# Altium PCB Wi-FiR.PcbDoc (part 2 of 3)
Units mm, origin at the board's own origin, x right, y up, seen from the top; angles counter-clockwise.
Board outline 58.03 x 53.68 mm, 2 copper layers (Top Layer, Bottom Layer); 105 components, 77 nets, 361 pads, 200 vias.
Unrouted connection lines stored in the file: 1.
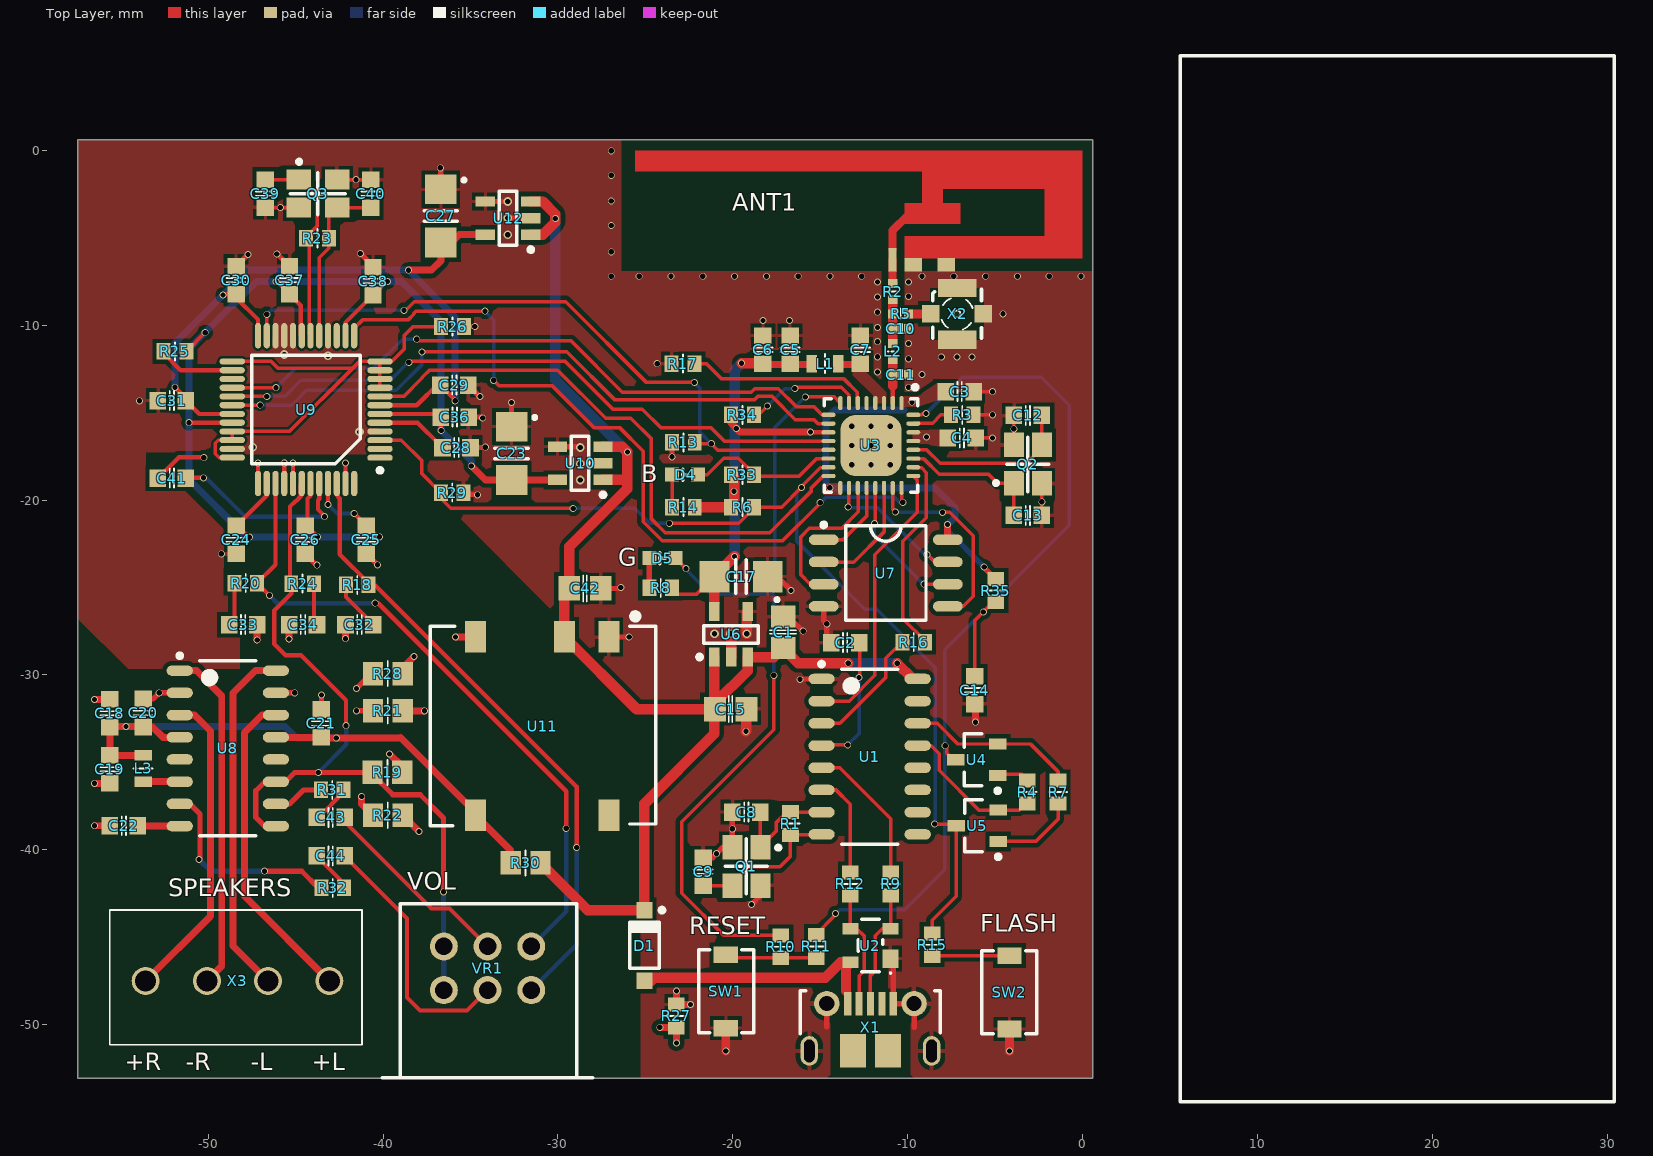
[diagram p0: Top Layer view]

## Part data (continued)
R1 R23: library part CRCW06031M00FKEA, "RES SMD 1M 0603 1% 1/10W", Case/Package=0603, Case Code (Metric)=1608, Manufacturer=Vishay, Max Operating Temperature=155°C, Max Power Dissipation=100mW, Min Operating Temperature=-55°C, Package Quantity=10, Resistance=1MR, Supplier Part Number 1=541-1.00MHCT-ND, Temperature Coefficient=100ppm/°C, Tolerance=1%, Voltage Rating=75V, Case Code (Imperial)=0603, ComponentLink1Description=http://uk.rs-online.com/webdocs/0d98/0900766b80d98afc.pdf?src-supplier=RSComponents, ComponentLink1URL=http://uk.rs-online.com/webdocs/0d98/0900766b80d98afc.pdf?src-supplier=RSComponents, ComponentLink2Description=https://www.distrelec.biz/Web/Downloads/a_/en/flD-CRCW-e3_data_en.pdf?mime=application%2Fpdf&src-supplier=Distrelec, ComponentLink2URL=https://www.distrelec.biz/Web/Downloads/a_/en/flD-CRCW-e3_data_en.pdf?mime=application%2Fpdf&src-supplier=Distrelec, ComponentLink3Description=http://www.vishay.com/docs/20035/dcrcwe3.pdf?src-supplier=Digi-Key, ComponentLink3URL=http://www.vishay.com/docs/20035/dcrcwe3.pdf?src-supplier=Digi-Key, ComponentLink4Description=http://www.vishay.com/docs/20035/dcrcwe3.pdf?src-supplier=Future+Electronics, ComponentLink4URL=http://www.vishay.com/docs/20035/dcrcwe3.pdf?src-supplier=Future+Electronics, ComponentLink5Description=http://www.farnell.com/datasheets/2310790.pdf?src-supplier=Element14, ComponentLink5URL=http://www.farnell.com/datasheets/2310790.pdf?src-supplier=Element14, ComponentLink6Description=http://www.farnell.com/datasheets/125364.pdf?src-supplier=Element14, ComponentLink6URL=http://www.farnell.com/datasheets/125364.pdf?src-supplier=Element14, Composition="Thick Film", Contact Plating=Tin, Depth=0.85mm, Features="Automotive AEC-Q200", Height=0.45mm, Lead Free="Lead Free", Length=1.55mm, Manufacturer Part Number=CRCW06031M00FKEA, Military Standard=Not, Mount="Surface Mount", Number of Pins=2, Number of Terminations=2, Packaging="Tape and Reel", Power Rating=100mW, Pricing 1="1=0.1, 10=0.036, 100=0.0146, 1000=0.0065, 2500=0.0057 (USD)", Radiation Hardening=No, REACH SVHC=Unknown, Stock 1=466723, Supplier 1=Digi-Key, Termination=SMD/SMT, Voltage Rating (DC)=75V, Weight=7.1E-05oz, Width=0.85mm
R2 R5: library part CRCW04020000Z0ED, "RES SMD 0R 0402 JUMPER 1/16W", Case/Package=0402, Case Code (Metric)=1005, Manufacturer=Vishay, Max Operating Temperature=155°C, Max Power Dissipation=63mW, Min Operating Temperature=-55°C, Package Quantity=1, Resistance=0mR, Supplier Part Number 1=541-0.0JCT-ND, Temperature Coefficient=100ppm/°C, Tolerance=5%, Voltage Rating=50V, Case Code (Imperial)=0402, ComponentLink1Description=http://www.vishay.com/docs/20035/dcrcwe3.pdf?src-supplier=Avnet+Europe, ComponentLink1URL=http://www.vishay.com/docs/20035/dcrcwe3.pdf?src-supplier=Avnet+Europe, ComponentLink2Description=http://www.vishay.com/docs/20035/dcrcwe3.pdf?src-supplier=Avnet, ComponentLink2URL=http://www.vishay.com/docs/20035/dcrcwe3.pdf?src-supplier=Avnet, ComponentLink3Description=http://www.vishay.com/docs/20035/dcrcwe3.pdf?src-supplier=Digi-Key, ComponentLink3URL=http://www.vishay.com/docs/20035/dcrcwe3.pdf?src-supplier=Digi-Key, ComponentLink4Description=http://www.farnell.com/datasheets/2793682.pdf?src-supplier=Element14, ComponentLink4URL=http://www.farnell.com/datasheets/2793682.pdf?src-supplier=Element14, ComponentLink5Description=http://www.vishay.com/docs/20035/dcrcwe3.pdf?src-supplier=Allied+Electronics, ComponentLink5URL=http://www.vishay.com/docs/20035/dcrcwe3.pdf?src-supplier=Allied+Electronics, ComponentLink6Description=https://www.distrelec.biz/Web/Downloads/a_/en/flD-CRCW-e3_data_en.pdf?mime=application%2Fpdf&src-supplier=Distrelec, ComponentLink6URL=https://www.distrelec.biz/Web/Downloads/a_/en/flD-CRCW-e3_data_en.pdf?mime=application%2Fpdf&src-supplier=Distrelec, Composition="Thick Film", Contact Plating=Tin, Depth=0.5mm, Features="Automotive AEC-Q200", Height=0.35mm, Lead Free="Lead Free", Length=1mm, Manufacturer Part Number=CRCW04020000Z0ED, Military Standard=Not, Mount="Surface Mount", Number of Terminations=2, Packaging="Tape and Reel", Power Rating=63mW, Pricing 1="1=0.1, 10=0.034, 25=0.0244, 50=0.0186, 100=0.0138, 250=0.0105, 500=0.0084, 1000=0.0062, 5000=0.0044 (USD)", Radiation Hardening=No, REACH SVHC=Unknown, Stock 1=2460113, Supplier 1=Digi-Key, Termination=SMD/SMT, Voltage Rating (DC)=50V, Weight=2.3E-05oz, Width=0.5mm
R3 R4 R7 R13: library part CRCW060312K0FKEAC, "RES SMD 12K 0603 1% 1/10W", Case/Package=0603, Case Code (Metric)=1608, Manufacturer=Vishay, Max Operating Temperature=155°C, Max Power Dissipation=100mW, Min Operating Temperature=-55°C, Resistance=12kR, Supplier Part Number 1=541-4046-1-ND, Temperature Coefficient=100ppm/°C, Tolerance=1%, Case Code (Imperial)=0603, ComponentLink1Description=http://www.vishay.com/docs/28773/crcwce3.pdf?src-supplier=Digi-Key, ComponentLink1URL=http://www.vishay.com/docs/28773/crcwce3.pdf?src-supplier=Digi-Key, Composition="Thick Film", Manufacturer Part Number=CRCW060312K0FKEAC, Number of Terminations=2, Packaging="Cut Tape", Pricing 1="1=0.1, 10=0.036, 100=0.0146, 1000=0.0065, 2500=0.0057 (USD)", Stock 1=84165, Supplier 1=Digi-Key
R6 R31 R32 R33 R34 R35: library part CRCW060310K0FKEA, "RES SMD 10K 0603 1% 1/10W", Case/Package=0603, Case Code (Metric)=1608, Manufacturer=Vishay, Max Operating Temperature=155°C, Max Power Dissipation=100mW, Min Operating Temperature=-55°C, Package Quantity=10, Resistance=10kR, Supplier Part Number 1=541-10.0KHCT-ND, Temperature Coefficient=100ppm/°C, Tolerance=1%, Voltage Rating=75V, Case Code (Imperial)=0603, ComponentLink1Description=http://www.vishay.com/docs/20008/dcrcw.pdf?src-supplier=Avnet+Europe, ComponentLink1URL=http://www.vishay.com/docs/20008/dcrcw.pdf?src-supplier=Avnet+Europe, ComponentLink2Description=https://www.verical.com/server-webapp/html/getDatasheet?partID=86831&src-supplier=Verical, ComponentLink2URL=https://www.verical.com/server-webapp/html/getDatasheet?partID=86831&src-supplier=Verical, ComponentLink3Description=http://www.farnell.com/datasheets/2310790.pdf?src-supplier=Allied+Electronics, ComponentLink3URL=http://www.farnell.com/datasheets/2310790.pdf?src-supplier=Allied+Electronics, ComponentLink4Description=http://www.vishay.com/docs/20035/dcrcwe3.pdf?src-supplier=Digi-Key, ComponentLink4URL=http://www.vishay.com/docs/20035/dcrcwe3.pdf?src-supplier=Digi-Key, ComponentLink5Description=http://www.farnell.com/datasheets/2310790.pdf?src-supplier=Mouser, ComponentLink5URL=http://www.farnell.com/datasheets/2310790.pdf?src-supplier=Mouser, ComponentLink6Description=http://www.farnell.com/datasheets/2310790.pdf?src-supplier=Element14, ComponentLink6URL=http://www.farnell.com/datasheets/2310790.pdf?src-supplier=Element14, ComponentLink7Description=http://www.farnell.com/datasheets/2310790.pdf?src-supplier=Avnet, ComponentLink7URL=http://www.farnell.com/datasheets/2310790.pdf?src-supplier=Avnet, ComponentLink8Description=http://www.vishay.com/docs/20035/dcrcwe3.pdf?src-supplier=Future+Electronics, ComponentLink8URL=http://www.vishay.com/docs/20035/dcrcwe3.pdf?src-supplier=Future+Electronics, ComponentLink9Description=http://uk.rs-online.com/webdocs/0d98/0900766b80d98afc.pdf?src-supplier=RSComponents, ComponentLink9URL=http://uk.rs-online.com/webdocs/0d98/0900766b80d98afc.pdf?src-supplier=RSComponents, ComponentLink10Description=http://www.farnell.com/datasheets/2310790.pdf?src-supplier=Distrelec, ComponentLink10URL=http://www.farnell.com/datasheets/2310790.pdf?src-supplier=Distrelec, Composition="Thick Film", Contact Plating=Tin,Lead, Depth=0.85mm, Features="Automotive AEC-Q200", Height=0.45mm, Lead Free="Lead Free", Length=1.55mm, Manufacturer Part Number=CRCW060310K0FKEA, Military Standard=Not, Number of Pins=2, Number of Terminations=2, Packaging="Tape and Reel", Power Rating=100mW, Pricing 1="1=0.1, 10=0.036, 100=0.0146, 1000=0.0065, 2500=0.0057 (USD)", Radiation Hardening=No, REACH SVHC=Unknown, Stock 1=2959816, Supplier 1=Digi-Key, Termination=SMD/SMT, Voltage Rating (DC)=75V, Weight=7.1E-05oz, Width=0.033inch
R8 R11 R15: library part CRCW0603470RFKEAC, "RES SMD 470 0603 1% 1/10W", Case/Package=0603, Manufacturer=Vishay, Power Rating=100mW, Supplier Part Number 1=541-4038-1-ND, Tolerance=1%, ComponentLink1Description=http://www.vishay.com/docs/28773/crcwce3.pdf?src-supplier=Digi-Key, ComponentLink1URL=http://www.vishay.com/docs/28773/crcwce3.pdf?src-supplier=Digi-Key, Lead Free="Lead Free", Manufacturer Part Number=CRCW0603470RFKEAC, Pricing 1="1=0.1, 10=0.036, 100=0.0146, 1000=0.0065, 2500=0.0057 (USD)", Resistance=470R, Stock 1=239653, Supplier 1=Digi-Key
R9 R12 R18 R20: library part CRCW060320R0FKEAHP, "RES SMD 20 0603 1% 1/4W", Case/Package=0603, Case Code (Metric)=1608, Manufacturer="Vishay Dale", Max Operating Temperature=155°C, Max Power Dissipation=250mW, Min Operating Temperature=-55°C, Package Quantity=10, Supplier Part Number 1=541-20.0SCT-ND, Temperature Coefficient=100ppm/°C, Tolerance=1%, Voltage Rating=75V, Case Code (Imperial)=0603, ComponentLink1Description=http://www.vishay.com/docs/20043/crcwhpe3.pdf?src-supplier=Avnet, ComponentLink1URL=http://www.vishay.com/docs/20043/crcwhpe3.pdf?src-supplier=Avnet, ComponentLink2Description=http://www.vishay.com/docs/20043/crcwhpe3.pdf?src-supplier=Digi-Key, ComponentLink2URL=http://www.vishay.com/docs/20043/crcwhpe3.pdf?src-supplier=Digi-Key, ComponentLink3Description=http://www.vishay.com/doc?20043?src-supplier=Mouser, ComponentLink3URL=http://www.vishay.com/doc?20043?src-supplier=Mouser, Composition="Thick Film", Contact Plating=Tin, Depth=0.85mm, Features="Automotive AEC-Q200", Height=0.45mm, Lead Free="Lead Free", Length=1.6mm, Manufacturer Part Number=CRCW060320R0FKEAHP, Mount="Surface Mount", Number of Terminations=2, Packaging="Tape and Reel", Power Rating=250mW, Pricing 1="1=0.18, 10=0.149, 100=0.0581, 1000=0.0243, 2500=0.0223 (USD)", Radiation Hardening=No, Resistance=20R, Stock 1=2361, Supplier 1=Digi-Key, Termination=Wraparound, Weight=7.1E-05oz, Width=0.033inch
R10 R17 R27: library part CRCW0603-0000Z0EA, "RES SMD 0R 0603 JUMPER PU=5000 ST, CRCW06030000Z0EA, Vishay", Case/Package=0603, Case Code (Metric)=1608, Current Rating=2A, Manufacturer=Vishay, Max Operating Temperature=155°C, Max Power Dissipation=100mW, Min Operating Temperature=-55°C, Package Quantity=1, Resistance=0mR, Supplier Part Number 1=70202889, Temperature Coefficient=100ppm/°C, Tolerance=5%, Voltage Rating=75V, Case Code (Imperial)=0603, ComponentLink1Description=http://www.vishay.com/docs/20035/dcrcwe3.pdf?src-supplier=Digi-Key, ComponentLink1URL=http://www.vishay.com/docs/20035/dcrcwe3.pdf?src-supplier=Digi-Key, ComponentLink2Description=http://www.farnell.com/datasheets/2310790.pdf?src-supplier=Avnet, ComponentLink2URL=http://www.farnell.com/datasheets/2310790.pdf?src-supplier=Avnet, ComponentLink3Description=http://www.vishay.com/docs/20008/dcrcw.pdf?src-supplier=Avnet+Europe, ComponentLink3URL=http://www.vishay.com/docs/20008/dcrcw.pdf?src-supplier=Avnet+Europe, ComponentLink4Description=http://www.vishay.com/docs/20035/dcrcwe3.pdf?src-supplier=Future+Electronics, ComponentLink4URL=http://www.vishay.com/docs/20035/dcrcwe3.pdf?src-supplier=Future+Electronics, ComponentLink5Description=http://www.alliedelec.com/m/d/0c934d6939ccefa68dbe0b96d821c8cf.pdf?src-supplier=Allied+Electronics, ComponentLink5URL=http://www.alliedelec.com/m/d/0c934d6939ccefa68dbe0b96d821c8cf.pdf?src-supplier=Allied+Electronics, ComponentLink6Description=https://www.distrelec.biz/Web/Downloads/a_/en/flD-CRCW-e3_data_en.pdf?mime=application%2Fpdf&src-supplier=Distrelec, ComponentLink6URL=https://www.distrelec.biz/Web/Downloads/a_/en/flD-CRCW-e3_data_en.pdf?mime=application%2Fpdf&src-supplier=Distrelec, ComponentLink7Description=http://www.farnell.com/datasheets/2310790.pdf?src-supplier=Mouser, ComponentLink7URL=http://www.farnell.com/datasheets/2310790.pdf?src-supplier=Mouser, ComponentLink8Description=http://www.farnell.com/datasheets/2310790.pdf?src-supplier=Element14, ComponentLink8URL=http://www.farnell.com/datasheets/2310790.pdf?src-supplier=Element14, ComponentLink9Description=http://www.farnell.com/datasheets/125364.pdf?src-supplier=Element14, ComponentLink9URL=http://www.farnell.com/datasheets/125364.pdf?src-supplier=Element14, Composition="Thick Film", Contact Plating=Tin,Lead, Depth=0.85mm, Features="Automotive AEC-Q200", Height=0.02inch, Lead Free="Lead Free", Length=1.55mm, Manufacturer Part Number=CRCW0603-0000Z0EA, Military Standard=Not, Mount="Surface Mount", Number of Terminations=2, Packaging="Tape and Reel", Power Rating=100mW, Radiation Hardening=No, REACH SVHC=Unknown, Stock 1=0, Supplier 1="Allied Electronics", Termination=SMD/SMT, Voltage Rating (DC)=75V, Weight=7.1E-05oz, Width=0.033inch, Working Voltage=75V
R14: library part CRCW06032K20FKEAC, "RES SMD 2.2K 0603 1% 1/10W", Case/Package=Molded, Manufacturer="Vishay Semiconductors", Max Operating Temperature=155°C, Min Operating Temperature=-55°C, Power Rating=100mW, Resistance=2.2kR, Supplier Part Number 1=541-4022-1-ND, Temperature Coefficient=100ppm/°C, Tolerance=1%, ComponentLink1Description=http://www.vishay.com/docs/20035/dcrcwe3.pdf?src-supplier=Avnet+Asia, ComponentLink1URL=http://www.vishay.com/docs/20035/dcrcwe3.pdf?src-supplier=Avnet+Asia, ComponentLink2Description=http://www.vishay.com/docs/28773/crcwce3.pdf?src-supplier=Digi-Key, ComponentLink2URL=http://www.vishay.com/docs/28773/crcwce3.pdf?src-supplier=Digi-Key, Composition="Thick Film", Contact Plating=Tin, Lead Free="Lead Free", Length=1.55mm, Manufacturer Part Number=CRCW06032K20FKEAC, Mount="Surface Mount", Pricing 1="1=0.1, 10=0.036, 100=0.0146, 1000=0.0065, 2500=0.0057 (USD)", Stock 1=175447, Supplier 1=Digi-Key, Termination=Wraparound
R16: library part CRCW0603499RFKEAHP, "RES SMD 499 0603 1% 1/4W", Case/Package=0603, Case Code (Metric)=1608, Manufacturer="Vishay Dale", Max Operating Temperature=155°C, Max Power Dissipation=250mW, Min Operating Temperature=-55°C, Package Quantity=10, Supplier Part Number 1=541-499SCT-ND, Temperature Coefficient=100ppm/°C, Tolerance=1%, Voltage Rating=75V, Case Code (Imperial)=0603, ComponentLink1Description=http://www.vishay.com/docs/20043/crcwhpe3.pdf?src-supplier=Digi-Key, ComponentLink1URL=http://www.vishay.com/docs/20043/crcwhpe3.pdf?src-supplier=Digi-Key, ComponentLink2Description=http://www.mouser.com/ds/2/427/crcwhpe3-46056.pdf?src-supplier=Mouser, ComponentLink2URL=http://www.mouser.com/ds/2/427/crcwhpe3-46056.pdf?src-supplier=Mouser, ComponentLink3Description=http://www.vishay.com/docs/20043/crcwhpe3.pdf?src-supplier=Avnet, ComponentLink3URL=http://www.vishay.com/docs/20043/crcwhpe3.pdf?src-supplier=Avnet, Composition="Thick Film", Contact Plating=Tin, Depth=0.85mm, Features="Automotive AEC-Q200", Height=0.45mm, Lead Free="Lead Free", Length=1.6mm, Manufacturer Part Number=CRCW0603499RFKEAHP, Military Standard=Not, Number of Terminations=2, Packaging="Tape and Reel", Power Rating=250mW, Pricing 1="1=0.18, 10=0.149, 100=0.0581, 1000=0.0243, 2500=0.0223 (USD)", Radiation Hardening=No, Resistance=499R, Stock 1=127078, Supplier 1=Digi-Key, Termination=SMD/SMT, Weight=7.1E-05oz, Width=0.033inch
R19 R21 R22 R28 R30: library part CRCW08050000Z0EAHP, "RES SMD 0R 0805 JUMPER 1/2W", Case/Package=0805, Case Code (Metric)=2012, Manufacturer="Vishay Dale", Max Operating Temperature=155°C, Max Power Dissipation=500mW, Min Operating Temperature=-55°C, Package Quantity=5000, Power Rating=330mW, Resistance=0mR, Supplier Part Number 1=541-0.0TBCT-ND, Temperature Coefficient=0ppm/°C, Tolerance=5%, Voltage Rating=150V, Case Code (Imperial)=0805, ComponentLink1Description=http://www.vishay.com/docs/20043/crcwhpe3.pdf?src-supplier=Future+Electronics, ComponentLink1URL=http://www.vishay.com/docs/20043/crcwhpe3.pdf?src-supplier=Future+Electronics, ComponentLink2Description=http://www.vishay.com/docs/20043/crcwhpe3.pdf?src-supplier=Digi-Key, ComponentLink2URL=http://www.vishay.com/docs/20043/crcwhpe3.pdf?src-supplier=Digi-Key, ComponentLink3Description=http://www.mouser.com/ds/2/427/crcwhpe3-46056.pdf?src-supplier=Mouser, ComponentLink3URL=http://www.mouser.com/ds/2/427/crcwhpe3-46056.pdf?src-supplier=Mouser, ComponentLink4Description=http://www.vishay.com/docs/20043/crcwhpe3.pdf?src-supplier=Avnet+Europe, ComponentLink4URL=http://www.vishay.com/docs/20043/crcwhpe3.pdf?src-supplier=Avnet+Europe, ComponentLink5Description=http://www.vishay.com/docs/20043/crcwhpe3.pdf?src-supplier=Avnet, ComponentLink5URL=http://www.vishay.com/docs/20043/crcwhpe3.pdf?src-supplier=Avnet, ComponentLink6Description=http://www.farnell.com/datasheets/2046716.pdf?src-supplier=Element14, ComponentLink6URL=http://www.farnell.com/datasheets/2046716.pdf?src-supplier=Element14, Composition="Thick Film", Contact Plating=Tin, Depth=1.25mm, Features="Automotive AEC-Q200", Height=0.024inch, Lead Free="Lead Free", Length=2mm, Manufacturer Part Number=CRCW08050000Z0EAHP, Military Standard=Not, Mount="Surface Mount", Number of Pins=2, Number of Terminations=2, Packaging="Tape and Reel", Pricing 1="1=0.25, 10=0.213, 25=0.1548, 50=0.1122, 100=0.0832, 250=0.0639, 500=0.0503, 1000=0.0349 (USD)", Radiation Hardening=No, REACH SVHC="No SVHC", Stock 1=330626, Supplier 1=Digi-Key, Termination=Solder, Voltage Rating (DC)=150V, Weight=0.000194oz, Width=0.049inch
R24: library part RCA060310R0FKEAHP, "RES SMD 10 0603 1% 1/4W", Case/Package=0603, Case Code (Metric)=1608, Current Rating=700mA, DC Resistance (DCR)=170mR, Inductance=15nH, Manufacturer="Vishay Dale", Max Operating Temperature=125°C, Max Power Dissipation=250mW, Min Operating Temperature=-55°C, Ratings=AEC-Q200, Self Resonant Frequency=4GHz, Supplier Part Number 1=541-3243-1-ND, Temperature Coefficient=100ppm/°C, Test Frequency=250MHz, Tolerance=2%, Case Code (Imperial)=0603, ComponentLink1Description=http://www.vishay.com/docs/20067/rcahp.pdf?src-supplier=Digi-Key, ComponentLink1URL=http://www.vishay.com/docs/20067/rcahp.pdf?src-supplier=Digi-Key, Composition="Thick Film,Wirewound", Core Material=Non-Magnetic, Features="Automotive AEC-Q200,Anti-Sulfur", Manufacturer Part Number=RCA060310R0FKEAHP, Mount="Surface Mount", Number of Terminations=2, Packaging="Cut Tape", Pricing 1="1=0.18, 10=0.156, 100=0.0611, 1000=0.0256, 2500=0.0234 (USD)", Resistance=10R, Shielding=Unshielded, Stock 1=23109, Supplier 1=Digi-Key
R25 R26 R29: library part CRCW0603-100KFKEA, "RES SMD 100K 0603 0.1W 1% SMT TCR 37 ppm/DegC", Case/Package=0603, Case Code (Metric)=1608, Manufacturer=Vishay, Max Operating Temperature=155°C, Max Power Dissipation=100mW, Min Operating Temperature=-55°C, Package Quantity=10, Resistance=100kR, Supplier Part Number 1=541-100KHDKR-ND, Temperature Coefficient=100ppm/°C, Tolerance=1%, Voltage Rating=75V, Case Code (Imperial)=0603, ComponentLink1Description=http://www.vishay.com/docs/20035/dcrcwe3.pdf?src-supplier=Digi-Key, ComponentLink1URL=http://www.vishay.com/docs/20035/dcrcwe3.pdf?src-supplier=Digi-Key, ComponentLink2Description=http://www.farnell.com/datasheets/2310790.pdf?src-supplier=Element14, ComponentLink2URL=http://www.farnell.com/datasheets/2310790.pdf?src-supplier=Element14, ComponentLink3Description=https://www.verical.com/server-webapp/html/getDatasheet?partID=93113&src-supplier=Verical, ComponentLink3URL=https://www.verical.com/server-webapp/html/getDatasheet?partID=93113&src-supplier=Verical, ComponentLink4Description=http://www.farnell.com/datasheets/2045673.pdf?src-supplier=Element14, ComponentLink4URL=http://www.farnell.com/datasheets/2045673.pdf?src-supplier=Element14, ComponentLink5Description=http://www.farnell.com/datasheets/2310790.pdf?src-supplier=Avnet, ComponentLink5URL=http://www.farnell.com/datasheets/2310790.pdf?src-supplier=Avnet, ComponentLink6Description=http://www.farnell.com/datasheets/2310790.pdf?src-supplier=Allied+Electronics, ComponentLink6URL=http://www.farnell.com/datasheets/2310790.pdf?src-supplier=Allied+Electronics, ComponentLink7Description=http://www.vishay.com/docs/20035/dcrcwe3.pdf?src-supplier=Avnet, ComponentLink7URL=http://www.vishay.com/docs/20035/dcrcwe3.pdf?src-supplier=Avnet, ComponentLink8Description=http://www.farnell.com/datasheets/2310790.pdf?src-supplier=Mouser, ComponentLink8URL=http://www.farnell.com/datasheets/2310790.pdf?src-supplier=Mouser, ComponentLink9Description=http://uk.rs-online.com/webdocs/0d98/0900766b80d98afc.pdf?src-supplier=RSComponents, ComponentLink9URL=http://uk.rs-online.com/webdocs/0d98/0900766b80d98afc.pdf?src-supplier=RSComponents, ComponentLink10Description=http://www.farnell.com/datasheets/2310790.pdf?src-supplier=Distrelec, ComponentLink10URL=http://www.farnell.com/datasheets/2310790.pdf?src-supplier=Distrelec, ComponentLink11Description=http://www.vishay.com/docs/20008/dcrcw.pdf?src-supplier=Avnet+Europe, ComponentLink11URL=http://www.vishay.com/docs/20008/dcrcw.pdf?src-supplier=Avnet+Europe, Composition="Thick Film", Contact Plating=Tin,Lead, Depth=0.85mm, Features="Automotive AEC-Q200", Height=0.45mm, Lead Free="Lead Free", Length=1.55mm, Manufacturer Part Number=CRCW0603-100KFKEA, Military Standard=Not, Number of Pins=2, Number of Terminations=2, Packaging="Tape and Reel", Power Rating=100mW, Pricing 1="1=0.1, 10=0.037, 100=0.0151, 1000=0.0068, 2500=0.0059 (USD)", Radiation Hardening=No, REACH SVHC=Unknown, Stock 1=945194, Supplier 1=Digi-Key, Termination=SMD/SMT, Voltage Rating (DC)=75V, Weight=7.1E-05oz, Width=0.033inch
SW1 SW2: library part PTS820J25MSMTRLFS, "SWITCH TACT SPST-NO 0.05A 12V", Color=Silver, Current Rating=50mA, Manufacturer="ITT C&K", Max Operating Temperature=85°C, Min Operating Temperature=-40°C, Operating Force=160gf, Package Quantity=2300, Supplier Part Number 1=CKN10839CT-ND, Voltage Rating (DC)=12V, Actuator Type=Standard, Contact Plating=Silver, Illumination Type=Non-Illuminated, Manufacturer Part Number=PTS820J25MSMTRLFS, Mechanical Life=200000Cycles, Mount="Surface Mount", Packaging="Tape and Reel", Pricing 1="1=0.51, 10=0.489, 25=0.4804, 50=0.4622, 100=0.3988, 250=0.3625, 500=0.3444, 1000=0.2719 (USD)", Stock 1=9227, Supplier 1=Digi-Key, Switch Function=Off-Mom, Switch Travel=0.2mm, Throw Configuration=SPST
U1: library part "IC CH340G USB to serial chip", "IC CH340G USB to serial chip"
U2: library part CD143A-SR05, "TVS DIODE 5V 20V SOT143", Breakdown Voltage=6V, Capacitance=10pF, Case/Package=SOT-143, Clamping Voltage=20V, Leakage Current=5uA, Manufacturer=Bourns, Max Operating Temperature=150°C, Max Power Dissipation=500W, Min Operating Temperature=-55°C, Package Quantity=1, Peak Pulse Current=30A, Power Line Protection=Yes, Reverse Standoff Voltage=5V, Supplier Part Number 1=CD143A-SR05CT-ND, Test Current=1mA, ComponentLink1Description=https://www.verical.com/server-webapp/html/getDatasheet?partID=29449&src-supplier=Verical, ComponentLink1URL=https://www.verical.com/server-webapp/html/getDatasheet?partID=29449&src-supplier=Verical, ComponentLink2Description=http://www.farnell.com/datasheets/1671020.pdf?src-supplier=Farnell, ComponentLink2URL=http://www.farnell.com/datasheets/1671020.pdf?src-supplier=Farnell, ComponentLink3Description=https://www.bourns.com/docs/Product-Datasheets/CD143A-SR05_12.pdf?src-supplier=Digi-Key, ComponentLink3URL=https://www.bourns.com/docs/Product-Datasheets/CD143A-SR05_12.pdf?src-supplier=Digi-Key, ComponentLink4Description=http://www.farnell.com/datasheets/1671020.pdf?src-supplier=Element14, ComponentLink4URL=http://www.farnell.com/datasheets/1671020.pdf?src-supplier=Element14, ComponentLink5Description=http://www.bourns.com/docs/Product-Datasheets/CD143A-SR05_12.pdf?src-supplier=Digi-Key, ComponentLink5URL=http://www.bourns.com/docs/Product-Datasheets/CD143A-SR05_12.pdf?src-supplier=Digi-Key, ComponentLink6Description=http://www.bourns.com/pdfs/CD143A-SR05_12.pdf?src-supplier=Avnet+Europe, ComponentLink6URL=http://www.bourns.com/pdfs/CD143A-SR05_12.pdf?src-supplier=Avnet+Europe, ComponentLink7Description=http://www.bourns.com/pdfs/CD143A-SR05_12.pdf?src-supplier=Avnet, ComponentLink7URL=http://www.bourns.com/pdfs/CD143A-SR05_12.pdf?src-supplier=Avnet, ComponentLink8Description=http://www.mouser.com/ds/2/54/D143A-SR05_12-777248.pdf?src-supplier=Mouser, ComponentLink8URL=http://www.mouser.com/ds/2/54/D143A-SR05_12-777248.pdf?src-supplier=Mouser, Contact Plating=Tin, Depth=1.39mm, Direction=Unidirectional, Element Configuration=Dual, ESD Protection=Yes, Height=0.045inch, Length=3.04mm, Manufacturer Part Number=CD143A-SR05, Max Breakdown Voltage=6V, Max Reverse Leakage Current=5uA, Min Breakdown Voltage=6V, Mount="Surface Mount", Number of Bidirectional Channels=2, Number of Channels=2, Number of Elements=1, Number of Pins=4, Packaging="Tape and Reel", Peak Pulse Power=500W, Polarity=Unidirectional, Power Dissipation=500W, Pricing 1="1=0.93, 10=0.836, 25=0.7932, 100=0.6515, 250=0.609, 500=0.5382, 1000=0.4249 (USD)", Radiation Hardening=No, REACH SVHC="No SVHC", Reverse Breakdown Voltage=6V, Stock 1=13371, Supplier 1=Digi-Key, Termination=SMD/SMT, Width=0.055inch, Working Voltage=5V
U3: "IC ESP8266EX, QFN32-PIN, 5_5", Current - Receiving=56mA, Current - Transmitting=170mA, Frequency=2.4GHz, Manufacturer="Espressif Systems", Supplier Part Number 1=1904-1001-1-ND, ComponentLink1Description=https://www.espressif.com/sites/default/files/documentation/esp8266_quick_start_guide_en.pdf?src-supplier=Digi-Key, ComponentLink1URL=https://www.espressif.com/sites/default/files/documentation/esp8266_quick_start_guide_en.pdf?src-supplier=Digi-Key, Data Rate=54Mbps, Interface=I2C,SPI,UART, Manufacturer Part Number=ESP8266EX, Number of GPIO=8, Packaging="Cut Tape", Pricing 1="1=1.6 (USD)", Sensitivity=-91dBm, Stock 1=4908, Supplier 1=Digi-Key
U4 U5: library part MMSS8050-H-TP, "TRANS NPN 25V 1.5A SOT23", Case/Package=SOT-23, Collector Base Voltage (VCBO)=40V, Collector Emitter Breakdown Voltage=25V, Collector Emitter Saturation Voltage=500mV, Emitter Base Voltage (VEBO)=5V, Manufacturer=MCC, Max Collector Current=1.5A, Max Operating Temperature=150°C, Max Power Dissipation=625mW, Min Operating Temperature=-55°C, Package Quantity=3000, Supplier Part Number 1=MMSS8050-H-TPMSCT-ND, Transition Frequency=100MHz, Collector Emitter Voltage (VCEO)=500mV, ComponentLink1Description=http://www.mouser.com/ds/2/258/MMSS8050-255048.pdf?src-supplier=Mouser, ComponentLink1URL=http://www.mouser.com/ds/2/258/MMSS8050-255048.pdf?src-supplier=Mouser, ComponentLink2Description=http://www.mccsemi.com/up_pdf/MMSS8050(SOT-23).pdf?src-supplier=Digi-Key, ComponentLink2URL=http://www.mccsemi.com/up_pdf/MMSS8050(SOT-23).pdf?src-supplier=Digi-Key, Element Configuration=Single, Gain Bandwidth Product=100MHz, hFE Min=120, Lead Free="Lead Free", Manufacturer Part Number=MMSS8050-H-TP, Max Breakdown Voltage=25V, Mount="Surface Mount", Number of Pins=3, Packaging="Tape and Reel", Polarity=NPN, Stock 1=77779, Supplier 1=Digi-Key
U6 U10: library part TLV70233DBVR, "IC REG LIN 3.3V 300mALow IQLDO Reg", Case/Package=SOT-23-5, Dropout Voltage=375mV, Manufacturer="Texas Instruments", Max Input Voltage=5.5V, Max Operating Temperature=125°C, Max Output Current=300mA, Max Power Dissipation=500mW, Min Current Limit=320mA, Min Input Voltage=2V, Min Operating Temperature=-40°C, Output Voltage Accuracy=0.5%, Package Quantity=1, Power Supply Rejection Ratio (PSRR)=68dB, Quiescent Current=30uA, Supplier Part Number 1=296-32415-1-ND, Accuracy=2%, ComponentLink1Description=http://www.farnell.com/datasheets/1882072.pdf?src-supplier=Element14, ComponentLink1URL=http://www.farnell.com/datasheets/1882072.pdf?src-supplier=Element14, ComponentLink2Description=http://www.ti.com/lit/ds/symlink/tlv702.pdf?src-supplier=Digi-Key, ComponentLink2URL=http://www.ti.com/lit/ds/symlink/tlv702.pdf?src-supplier=Digi-Key, Lead Free="Lead Free", Manufacturer Part Number=TLV70233DBVR, Max Output Voltage=3.3V, Min Output Voltage=3.3V, Nominal Output Voltage=3.3V, Number of Outputs=1, Number of Pins=5, Number of Regulators=1, Output Current=300mA, Output Type=Fixed, Output Voltage=3.3V, Packaging="Tape and Reel", Polarity=Positive, Power Dissipation=500mW, Pricing 1="1=0.5, 10=0.428, 100=0.3192, 500=0.2508, 1000=0.1938 (USD)", Radiation Hardening=No, REACH SVHC="No SVHC", Stock 1=29164, Supplier 1=Digi-Key
U7: library part W25Q32JVSSIQTR, "IC FLASH 32M SPI 133MHZ 8SOIC", Case/Package=SOIC, Frequency=104MHz, Manufacturer=Winbond, Max Operating Temperature=85°C, Min Operating Temperature=-40°C, Supplier Part Number 1=W25Q32JVSSIQCT-ND, ComponentLink1Description=http://www.winbond.com/resource-files/w25q32jv%20revg%2003272018%20plus.pdf?src-supplier=Digi-Key, ComponentLink1URL=http://www.winbond.com/resource-files/w25q32jv%20revg%2003272018%20plus.pdf?src-supplier=Digi-Key, Interface=SPI,Serial, Manufacturer Part Number=W25Q32JVSSIQTR, Memory Type=FLASH,NOR, Packaging="Tape and Reel", Stock 1=121887, Supplier 1=Digi-Key
U8: library part PAM8403DR-H, "IC AMP AUDIO 3W CLASS D 16SOIC", Case/Package=SOP, Manufacturer=Diodes, Max Operating Temperature=85°C, Max Output Power=3W, Max Supply Voltage=5.5V, Min Operating Temperature=-40°C, Min Supply Voltage=2.5V, Operating Supply Voltage=5V, Package Quantity=2500, Power Supply Rejection Ratio (PSRR)=59dB, Supplier Part Number 1=PAM8403DR-HDICT-ND, Voltage Gain=24dB, ComponentLink1Description=http://www.diodes.com/datasheets/PAM8403H.pdf?src-supplier=Avnet, ComponentLink1URL=http://www.diodes.com/datasheets/PAM8403H.pdf?src-supplier=Avnet, ComponentLink2Description=https://www.diodes.com/assets/Datasheets/PAM8403H.pdf?src-supplier=Digi-Key, ComponentLink2URL=https://www.diodes.com/assets/Datasheets/PAM8403H.pdf?src-supplier=Digi-Key, Manufacturer Part Number=PAM8403DR-H, Mount="Surface Mount", Number of Pins=16, Packaging="Tape and Reel", Pricing 1="1=0.81, 10=0.714, 100=0.5472, 500=0.4326, 1000=0.3461 (USD)", Radiation Hardening=No, Stock 1=8119, Supplier 1=Digi-Key
U9: library part 1681, "IC VS1053B MP3/WAV/OGG/MIDI Player & Recorder (CODEC) Chip", Manufacturer="Adafruit Industries", Supplier Part Number 1=1528-2645-ND, Manufacturer Part Number=1681, Pricing 1="1=12.5 (USD)", Stock 1=133, Supplier 1=Digi-Key
U11: library part R1SE-0505-R, "DC DC CONVERTER 5V 1W", Case/Package=SMD/SMT, Current - Output 1=200mA, Isolation Voltage=1kV, Manufacturer=Recom, Max Input Voltage=5.5V, Max Operating Temperature=85°C, Max Output Power=1W, Max Output Voltage=5V, Min Input Voltage=4.5V, Min Operating Temperature=-40°C, Package Quantity=1, Supplier Part Number 1=945-1659-1-ND, ComponentLink1Description=http://www.rapidonline.com/pdf/676127_da_en_01.pdf?src-supplier=Rapid+Electronics, ComponentLink1URL=http://www.rapidonline.com/pdf/676127_da_en_01.pdf?src-supplier=Rapid+Electronics, ComponentLink2Description=https://www.recom-power.com/pdf/Econoline/R1SE.pdf?src-supplier=Digi-Key, ComponentLink2URL=https://www.recom-power.com/pdf/Econoline/R1SE.pdf?src-supplier=Digi-Key, ComponentLink3Description=http://www.farnell.com/datasheets/1662785.pdf?src-supplier=Element14, ComponentLink3URL=http://www.farnell.com/datasheets/1662785.pdf?src-supplier=Element14, Depth=12.75mm, Efficiency=75%, Features=SCP, Height=6.7mm, Isolation=Isolated, Lead Free="Lead Free", Length=12.75mm, Manufacturer Part Number=R1SE-0505-R, Max Input Voltage (DC)=5.5V, Max Output Current=200mA, Max Power Dissipation=1W, Min Input Voltage (DC)=4.5V, Mount="Surface Mount", Nominal Input Voltage=5V, Nominal Output Voltage=5V, Number of Outputs=1, Number of Pins=5, Output Current=200mA, Output Power=1W, Output Voltage=5V, Packaging="Tape and Reel", Pricing 1="1=3.21, 5=3.162, 10=3.117, 25=3.0252, 50=2.9334, 100=2.8418, 250=2.7501 (USD)", REACH SVHC="No SVHC", Stock 1=12574, Supplier 1=Digi-Key, Voltage - Output 1=5V, Weight=1g, Width=10.7mm
U12: library part TLV70218DBVT, "IC REG LIN 1.8V 300MA SOT23-5", Case/Package=SOT-23, Dropout Voltage=220mV, Manufacturer="Texas Instruments", Max Input Voltage=5.5V, Max Operating Temperature=125°C, Max Output Current=300mA, Max Power Dissipation=500mW, Min Current Limit=320mA, Min Input Voltage=2V, Min Operating Temperature=-40°C, Output Voltage Accuracy=0.5%, Package Quantity=1, Quiescent Current=30uA, Supplier Part Number 1=296-27889-1-ND, Accuracy=2%, ComponentLink1Description=http://www.ti.com/lit/ds/symlink/tlv702.pdf?src-supplier=Digi-Key, ComponentLink1URL=http://www.ti.com/lit/ds/symlink/tlv702.pdf?src-supplier=Digi-Key, Contact Plating=Gold, Height=1.3mm, Lead Free="Lead Free", Length=3.05mm, Manufacturer Part Number=TLV70218DBVT, Max Output Voltage=1.8V, Min Output Voltage=1.8V, Nominal Output Voltage=1.8V, Number of Outputs=1, Number of Pins=5, Number of Regulators=1, Output Current=300mA, Output Type=Fixed, Output Voltage=1.8V, Packaging="Tape and Reel", Polarity=Positive, Power Dissipation=500mW, Power Rating=500mW, Pricing 1="1=0.58, 10=0.495, 100=0.3696 (USD)", REACH SVHC="No SVHC", Stock 1=3659, Supplier 1=Digi-Key, Width=1.75mm
VR1: library part PTD902-1025K-B503, "POT 50K LINEAR", Manufacturer=Bourns, Max Operating Temperature=50°C, Max Power Dissipation=50mW, Min Operating Temperature=-10°C, Package Quantity=108, Resistance=50kR, Supplier Part Number 1=PTD902-1025K-B503-ND, Tolerance=10%, Actuator Diameter=0.236inch, Actuator Length=0.984inch, ComponentLink1Description=http://www.bourns.com/docs/Product-Datasheets/PTD90.pdf?src-supplier=Digi-Key, ComponentLink1URL=http://www.bourns.com/docs/Product-Datasheets/PTD90.pdf?src-supplier=Digi-Key, ComponentLink2Description=http://www.mouser.com/ds/2/54/TD90-777943.pdf?src-supplier=Mouser, ComponentLink2URL=http://www.mouser.com/ds/2/54/TD90-777943.pdf?src-supplier=Mouser, Composition=Carbon, Depth=9.5mm, Length=34.65mm, Manufacturer Part Number=PTD902-1025K-B503, Military Standard=Not, Mount="Panel,Through Hole", Number of Gangs=2, Number of Turns=1, Packaging=Bulk, Power Rating=50mW, Pricing 1="1=2.01, 10=1.769, 25=1.586, 50=1.525, 108=1.464, 324=1.403, 540=1.159, 1080=1.098, 5076=0.915 (USD)", Radiation Hardening=No, Stock 1=183, Supplier 1=Digi-Key, Taper=Linear, Termination=Pin, Type=Potentiometer
X1: library part 105017-1001, "CONN USB Type B RCP 5 POS 0.65mm Solder RA Thru-Hole 5 Terminal 1 Port Embossed T/R", Manufacturer=Molex, Max Operating Temperature=85°C, Max Voltage Rating (AC)=30V, Min Operating Temperature=-30°C, Package Quantity=1, Supplier Part Number 1=WM11262CT-ND, ComponentLink1Description=http://www.molex.com/pdm_docs/sd/1050171001_sd.pdf?src-supplier=Digi-Key, ComponentLink1URL=http://www.molex.com/pdm_docs/sd/1050171001_sd.pdf?src-supplier=Digi-Key, ComponentLink2Description=https://www.verical.com/server-webapp/html/getDatasheet?partID=551961&src-supplier=Verical, ComponentLink2URL=https://www.verical.com/server-webapp/html/getDatasheet?partID=551961&src-supplier=Verical, Connector Type=USB, Contact Material="Copper Alloy", Contact Plating=Gold, Depth=5mm, Gender=Receptacle, Housing Material=Polymer, Length=7.5mm, Manufacturer Part Number=105017-1001, Mount="Surface Mount,Horizontal,Through Hole", Number of Contacts=5, Number of Ports=1, Number of Terminals=5, Orientation="Right Angle", Packaging="Tape and Reel", Pitch=0.65mm, Pricing 1="1=1.6, 10=1.456, 25=1.3668, 50=1.3072, 100=1.2479, 250=1.129, 500=1.0399, 1000=0.8913 (USD)", Radiation Hardening=No, REACH SVHC="No SVHC", Stock 1=8707, Supplier 1=Digi-Key, Termination=Solder, USB Standard="USB 2.0"
X2: library part 73412-0110, "CONN U.FL 50OHM MOLEX 73412-0110 RF COAXIAL, MICROCOAXIAL, JACK", Frequency=6GHz, Insulation Resistance=500MR, Manufacturer=Molex, Max Operating Temperature=90°C, Min Operating Temperature=-40°C, Package Quantity=5000, Supplier Part Number 1=WM5587CT-ND, Voltage Rating=60V, Body Material="Polymer,Liquid Crystal Polymer", Body Plating=Gold, ComponentLink1Description=http://www.molex.com/webdocs/datasheets/pdf/en-us/0734120110_RF_COAX_CONNECTORS.pdf?src-supplier=Avnet+Europe, ComponentLink1URL=http://www.molex.com/webdocs/datasheets/pdf/en-us/0734120110_RF_COAX_CONNECTORS.pdf?src-supplier=Avnet+Europe, ComponentLink2Description=http://uk.rs-online.com/webdocs/13c4/0900766b813c49d5.pdf?src-supplier=RSComponents, ComponentLink2URL=http://uk.rs-online.com/webdocs/13c4/0900766b813c49d5.pdf?src-supplier=RSComponents, ComponentLink3Description=http://www.farnell.com/datasheets/1841262.pdf?src-supplier=Farnell, ComponentLink3URL=http://www.farnell.com/datasheets/1841262.pdf?src-supplier=Farnell, ComponentLink4Description=http://www.molex.com/webdocs/datasheets/pdf/en-us/0734120110_RF_COAX_CONNECTORS.pdf?src-supplier=Mouser, ComponentLink4URL=http://www.molex.com/webdocs/datasheets/pdf/en-us/0734120110_RF_COAX_CONNECTORS.pdf?src-supplier=Mouser, ComponentLink5Description=http://www.onlinecomponents.com/productFiles/mf-MOL/1387750734120110_rf_coax_nectors.pdf?src-supplier=Onlinecomponents.com, ComponentLink5URL=http://www.onlinecomponents.com/productFiles/mf-MOL/1387750734120110_rf_coax_nectors.pdf?src-supplier=Onlinecomponents.com, ComponentLink6Description=http://www.farnell.com/datasheets/2698444.pdf?src-supplier=Element14, ComponentLink6URL=http://www.farnell.com/datasheets/2698444.pdf?src-supplier=Element14, ComponentLink7Description=http://www.molex.com/webdocs/datasheets/pdf/en-us/0734120110_RF_COAX_CONNECTORS.pdf?src-supplier=Avnet, ComponentLink7URL=http://www.molex.com/webdocs/datasheets/pdf/en-us/0734120110_RF_COAX_CONNECTORS.pdf?src-supplier=Avnet, Connector Type=Coaxial, Contact Material=Bronze,Brass, Contact Plating=Gold, Gender=Female, Halogen Free="Low Halogen", Impedance=50R, Lead Free="Lead Free", Manufacturer Part Number=73412-0110, Material=Bronze, Mating Cycles=30, Max Frequency=6GHz, Mount="Surface Mount,Through Hole,PCB", Orientation=Straight, Packaging="Tape and Reel", Polarity=Standard, Pricing 1="1=0.77, 10=0.722, 25=0.6496, 50=0.5774, 100=0.5533, 250=0.5052, 500=0.4811, 1000=0.3969, 2500=0.3609 (USD)", Radiation Hardening=No, REACH SVHC=Unknown, Stock 1=91172, Supplier 1=Digi-Key, Termination=Solder, Voltage Rating (AC)=60V
X3: "TERMINAL 4 POS 3.5mm Solder ST Thru-Hole 17.5A/Contact Eurostyle™", Color=Black, Current=12A, Manufacturer=Molex, Max Operating Temperature=85°C, Max Supply Voltage (AC)=300V, Min Operating Temperature=-40°C, Supplier Part Number 1=WM7860-ND, ComponentLink1Description=https://www.verical.com/server-webapp/html/getDatasheet?partID=242364&src-supplier=Verical, ComponentLink1URL=https://www.verical.com/server-webapp/html/getDatasheet?partID=242364&src-supplier=Verical, Contact Material=Copper, Contact Plating=Tin, Depth=7.29mm, Housing Color=Black, Housing Material=Polyamide, Length=14mm, Manufacturer Part Number=0393570004, Max Voltage Rating (AC)=300V, Mount="Through Hole", Number of Contacts=4, Number of Levels=1, Number of Positions Per Level=4, Number of Rows=1, Orientation=Straight, Packaging=Bulk, Pitch=0.138inch, Plating=Nickel, Radiation Hardening=No, Stock 1=0, Supplier 1=Digi-Key, Termination=Solder, Voltage=300V, Wire Gauge (Max)=28AWG, Wire Gauge (Min)=16AWG

## Via types
v1: diameter 0.4, hole 0.3, Top Layer to Bottom Layer, tented both sides, 178 vias
v2: diameter 0.5, hole 0.3, Top Layer to Bottom Layer, tented both sides, 13 vias
v3: diameter 0.5, hole 0.3, Top Layer to Bottom Layer, 9 vias

## Nets (pads, with @x,y where several pads share a name; then routed paths per layer and width w, separated by ;. In a path a pad name is that pad's centre, name@x,y a point inside that pad or via, vN(x,y) a via of type N, cw(c..) or ccw(c..) an arc to the next point about the centre after c; other vN are vias at no path point)
1v8: C27.1 C28.2 C29.2 C30.2 C31.2 U9.5 U9.7 U9.24 U9.31 U12.5 | length 49
  Top Layer w0.24: v1(-51.9,-13.55) -51.275,-14.175 C31.2@-51.275,-14.313 -50.513,-15.075 U9.31@-48.625,-15.075 ; v1(-49.15,-8.275) -49.15,-8.225 C30.2@-48.4,-8.225 -48.4,-8.431 -47.15,-9.681 U9.24@-47.15,-10.6 ; U9.5@-40.175,-15.575 -38.031,-15.575 -36.781,-16.825 C28.2@-36.6,-16.825 ; U9.7@-40.175,-14.575 -39.114,-14.575 ; -39.113,-14.576 -38.076,-14.576 C29.2@-36.825,-13.325 ; C29.2@-36.725,-13.425 -35.827,-14.323 -35.829,-14.326 v1(-35.877,-14.326)
  Top Layer w0.4: v1(-38.55,-6.85) -37.225,-6.85 -36.7,-6.325 C27.1@-36.7,-5.275 -36.1,-5.275 -35.65,-4.825 U12.5@-34.15,-4.825
  Bottom Layer w0.24: v1@-49.175,-8.3 v1(-49.15,-8.275)
  Bottom Layer w0.4: v1(-51.9,-13.55) -51.9,-11.025 v1@-49.175,-8.3 ; v1(-49.15,-8.275) -47.725,-6.85 v1(-38.55,-6.85) -35.877,-9.523 v1(-35.877,-14.326)